# Altium PCB xlr.PcbDoc
Units mm, origin at the board's own origin, x right, y up, seen from the top; angles counter-clockwise.
Board outline 128 x 40 mm, 2 copper layers (Top Layer, Bottom Layer); 8 components, 0 nets, 76 pads, 0 vias.
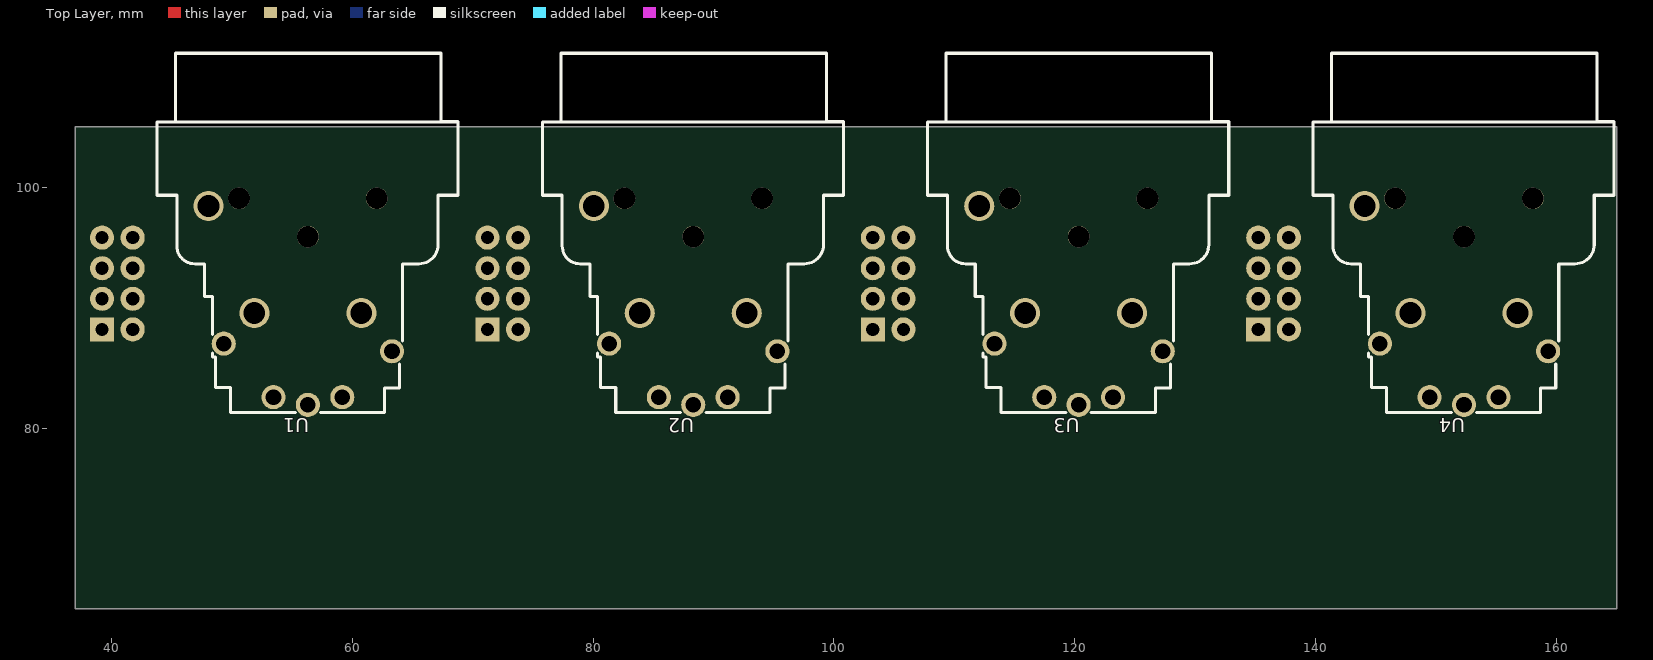
[diagram p0: Top Layer view]
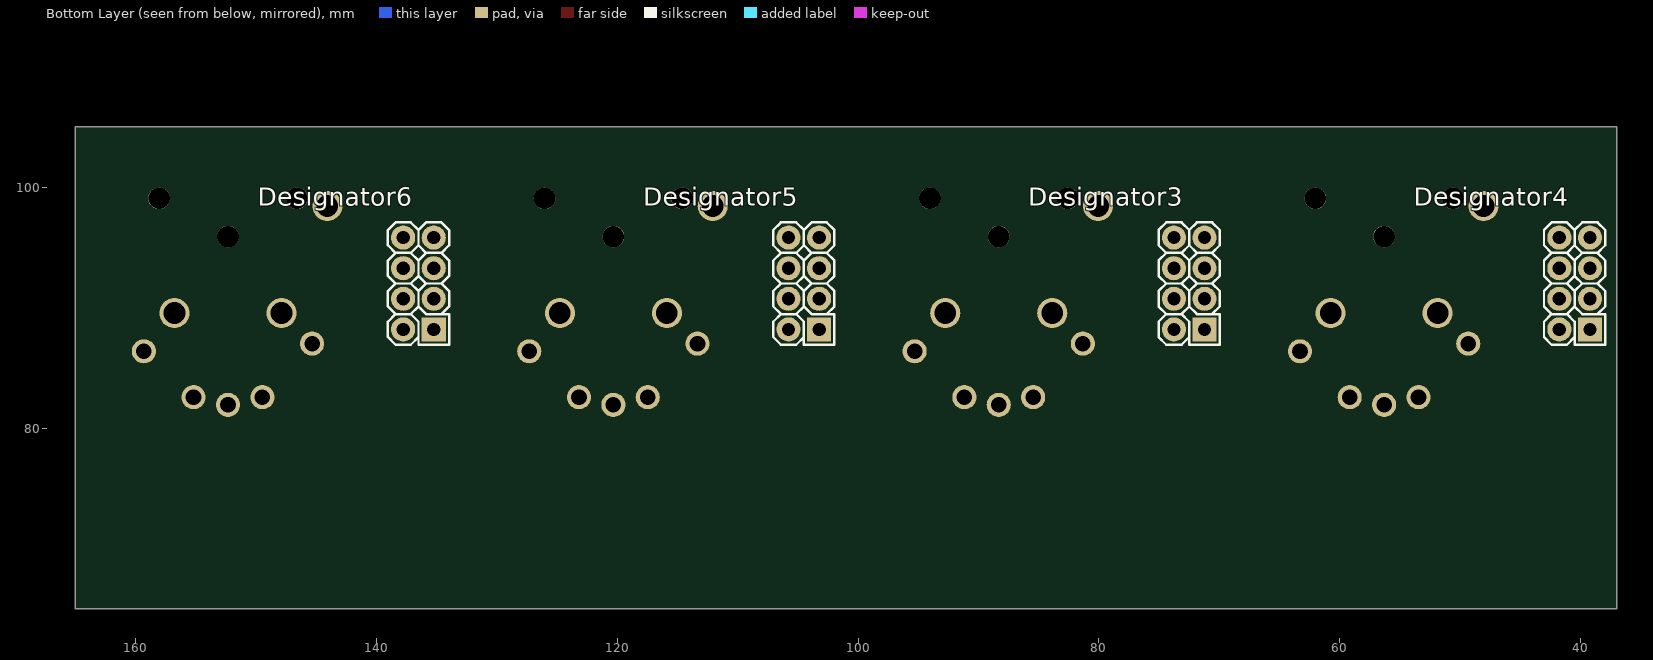
[diagram p1: Bottom Layer view, seen from below]

## Layer stack, top to bottom
Top Solder: solder mask 0.0102, Solder Resist, Dk 3.5
Top Layer: signal copper 0.0356
Dielectric 1: dielectric 0.32, FR-4, Dk 4.8
Bottom Layer: signal copper 0.0356
Bottom Solder: solder mask 0.0102, Solder Resist, Dk 3.5

## Board outline
37,65 37,105 165,105 165,65

## Design rules (kind name [scope] priority, off if disabled: settings)
Clearance [All] p1: gap=0.254 ignorepadtopadclearanceinfootprint=FALSE except(0: Arc-Hole Track-Hole SMDPad-Hole THPad-Hole Via-Hole Fill-Hole Poly-Hole Region-Hole Text-Hole)
PolygonConnect [All] p1: connectstyle=Relief reliefconductorwidth=0.254 reliefentries=4 polygonreliefangle="90 Angle" airgapwidth=0.254
RoutingVias [All] p1: holewidth=0.711 width=1.27 viastyle="Through Hole" minholewidth=0.711 minwidth=1.27 maxholewidth=0.711 maxwidth=1.27
SolderMaskExpansion [All] p1: expansion=0.102 istentingtop=FALSE
Width [All] p1: maxlimit=0.254 minlimit=0.254 preferedwidth=0.254
30 further rules are at their usual default settings.

## Components (designator, comment, footprint, x,y, rotation, side; value= is the part's Value field where it differs from the comment)
Designator3 "Comment" "CON: PLD-8" 72.5,92 r90 bottom
Designator4 "Comment" "CON: PLD-8" 40.5,92 r90 bottom
Designator5 "Comment" "CON: PLD-8" 104.5,92 r90 bottom
Designator6 "Comment" "CON: PLD-8" 136.5,92 r90 bottom
U1 "CONN-TH_NCJ6FA-H" CONN-TH_NCJ6FA-H 55.682,90.18 r180 top
U2 "CONN-TH_NCJ6FA-H" CONN-TH_NCJ6FA-H 87.682,90.18 r180 top (schematic designator U1)
U3 "CONN-TH_NCJ6FA-H" CONN-TH_NCJ6FA-H 119.682,90.18 r180 top (schematic designator U1)
U4 "CONN-TH_NCJ6FA-H" CONN-TH_NCJ6FA-H 151.682,90.18 r180 top (schematic designator U1)

## Footprints (in the part's own frame and the unit in brackets; to place one, negate y for a bottom-side part, rotate by r counter-clockwise, add the part's x,y. Pads: shape width x height; smd on the part's side, far side on the other; paste and mask are expansions set on the pad)
"CON: PLD-8" [mm] "PLD-40 8 pin header"
  rect 2x2 hole 1.1: 1(-3.81,-1.27)
  round 2 hole 1.1: 2(-3.81,1.27) 3(-1.27,-1.27) 4(-1.27,1.27) 5(1.27,-1.27) 6(1.27,1.27) 7(3.81,-1.27) 8(3.81,1.27)
  silkscreen extent -5.08,-2.54 5.08,2.54, body extent -5.13,-2.55 5.03,2.53, height 8.54
CONN-TH_NCJ6FA-H [mm]
  round 2 hole 1.3 paste-2539.97 mask+0.051: 1(6.35,3.175) 2(-7.62,3.81) 3(-0.635,8.255) 4(2.223,7.62) 5(-3.493,7.62)
  round 2.5 hole 1.8 paste-2539.97 mask+0.051: 6(3.81,0.635) 7(-5.08,0.635) 8(7.62,-8.255)
  round 1.8 hole 1.8 unplated paste-2539.97: ""(-6.35,-8.89) ""(-0.635,-5.715) ""(5.08,-8.89)
  silkscreen extent -13.1,-20.94 11.9,8.9

## Nets (pads, with @x,y where several pads share a name; then routed paths per layer and width w, separated by ;. In a path a pad name is that pad's centre, name@x,y a point inside that pad or via, vN(x,y) a via of type N, cw(c..) or ccw(c..) an arc to the next point about the centre after c; other vN are vias at no path point)
pads on no net: Designator3.1 Designator3.2 Designator3.3 Designator3.4 Designator3.5 Designator3.6 Designator3.7 Designator3.8 Designator4.1 Designator4.2 Designator4.3 Designator4.4 Designator4.5 Designator4.6 Designator4.7 Designator4.8 Designator5.1 Designator5.2 Designator5.3 Designator5.4 Designator5.5 Designator5.6 Designator5.7 Designator5.8 Designator6.1 Designator6.2 Designator6.3 Designator6.4 Designator6.5 Designator6.6 Designator6.7 Designator6.8 U1. U1.1 U1.2 U1.3 U1.4 U1.5 U1.6 U1.7 U1.8 U2. U2.1 U2.2 U2.3 U2.4 U2.5 U2.6 U2.7 U2.8 U3. U3.1 U3.2 U3.3 U3.4 U3.5 U3.6 U3.7 U3.8 U4. U4.1 U4.2 U4.3 U4.4 U4.5 U4.6 U4.7 U4.8

## Silkscreen, mask and mechanical layers (free items; w line width, h text height)
Board:
  lines w0.203: 37,65 50,65 165,65 165,105 50,105 37,105
  lines w0.254: 37,65 37,105
Mechanical 15:
  lines w0.254: 32.25,98.975 32.325,99.05 45.775,99.05 45.775,108.3 45.75,108.325 32.25,108.325 32.25,98.975 ; 64.25,98.95 64.25,108.3 77.75,108.3 77.775,108.275 77.775,99.025 64.325,99.025 64.25,98.95 ; 96.25,98.925 96.25,108.275 109.75,108.275 109.775,108.25 109.775,99 96.325,99 96.25,98.925 ; 128.275,98.925 128.275,108.275 141.775,108.275 141.8,108.25 141.8,99 128.35,99 128.275,98.925